# Altium PCB v1.PcbDoc (part 2 of 2)
Units mil, origin at the board's own origin, x right, y up, seen from the top; angles counter-clockwise.
Board outline 4577.38 x 7303.15 mil, 2 copper layers (Top Layer, Bottom Layer); 301 components, 195 nets, 1014 pads, 0 vias.
Unrouted connection lines stored in the file: 517.
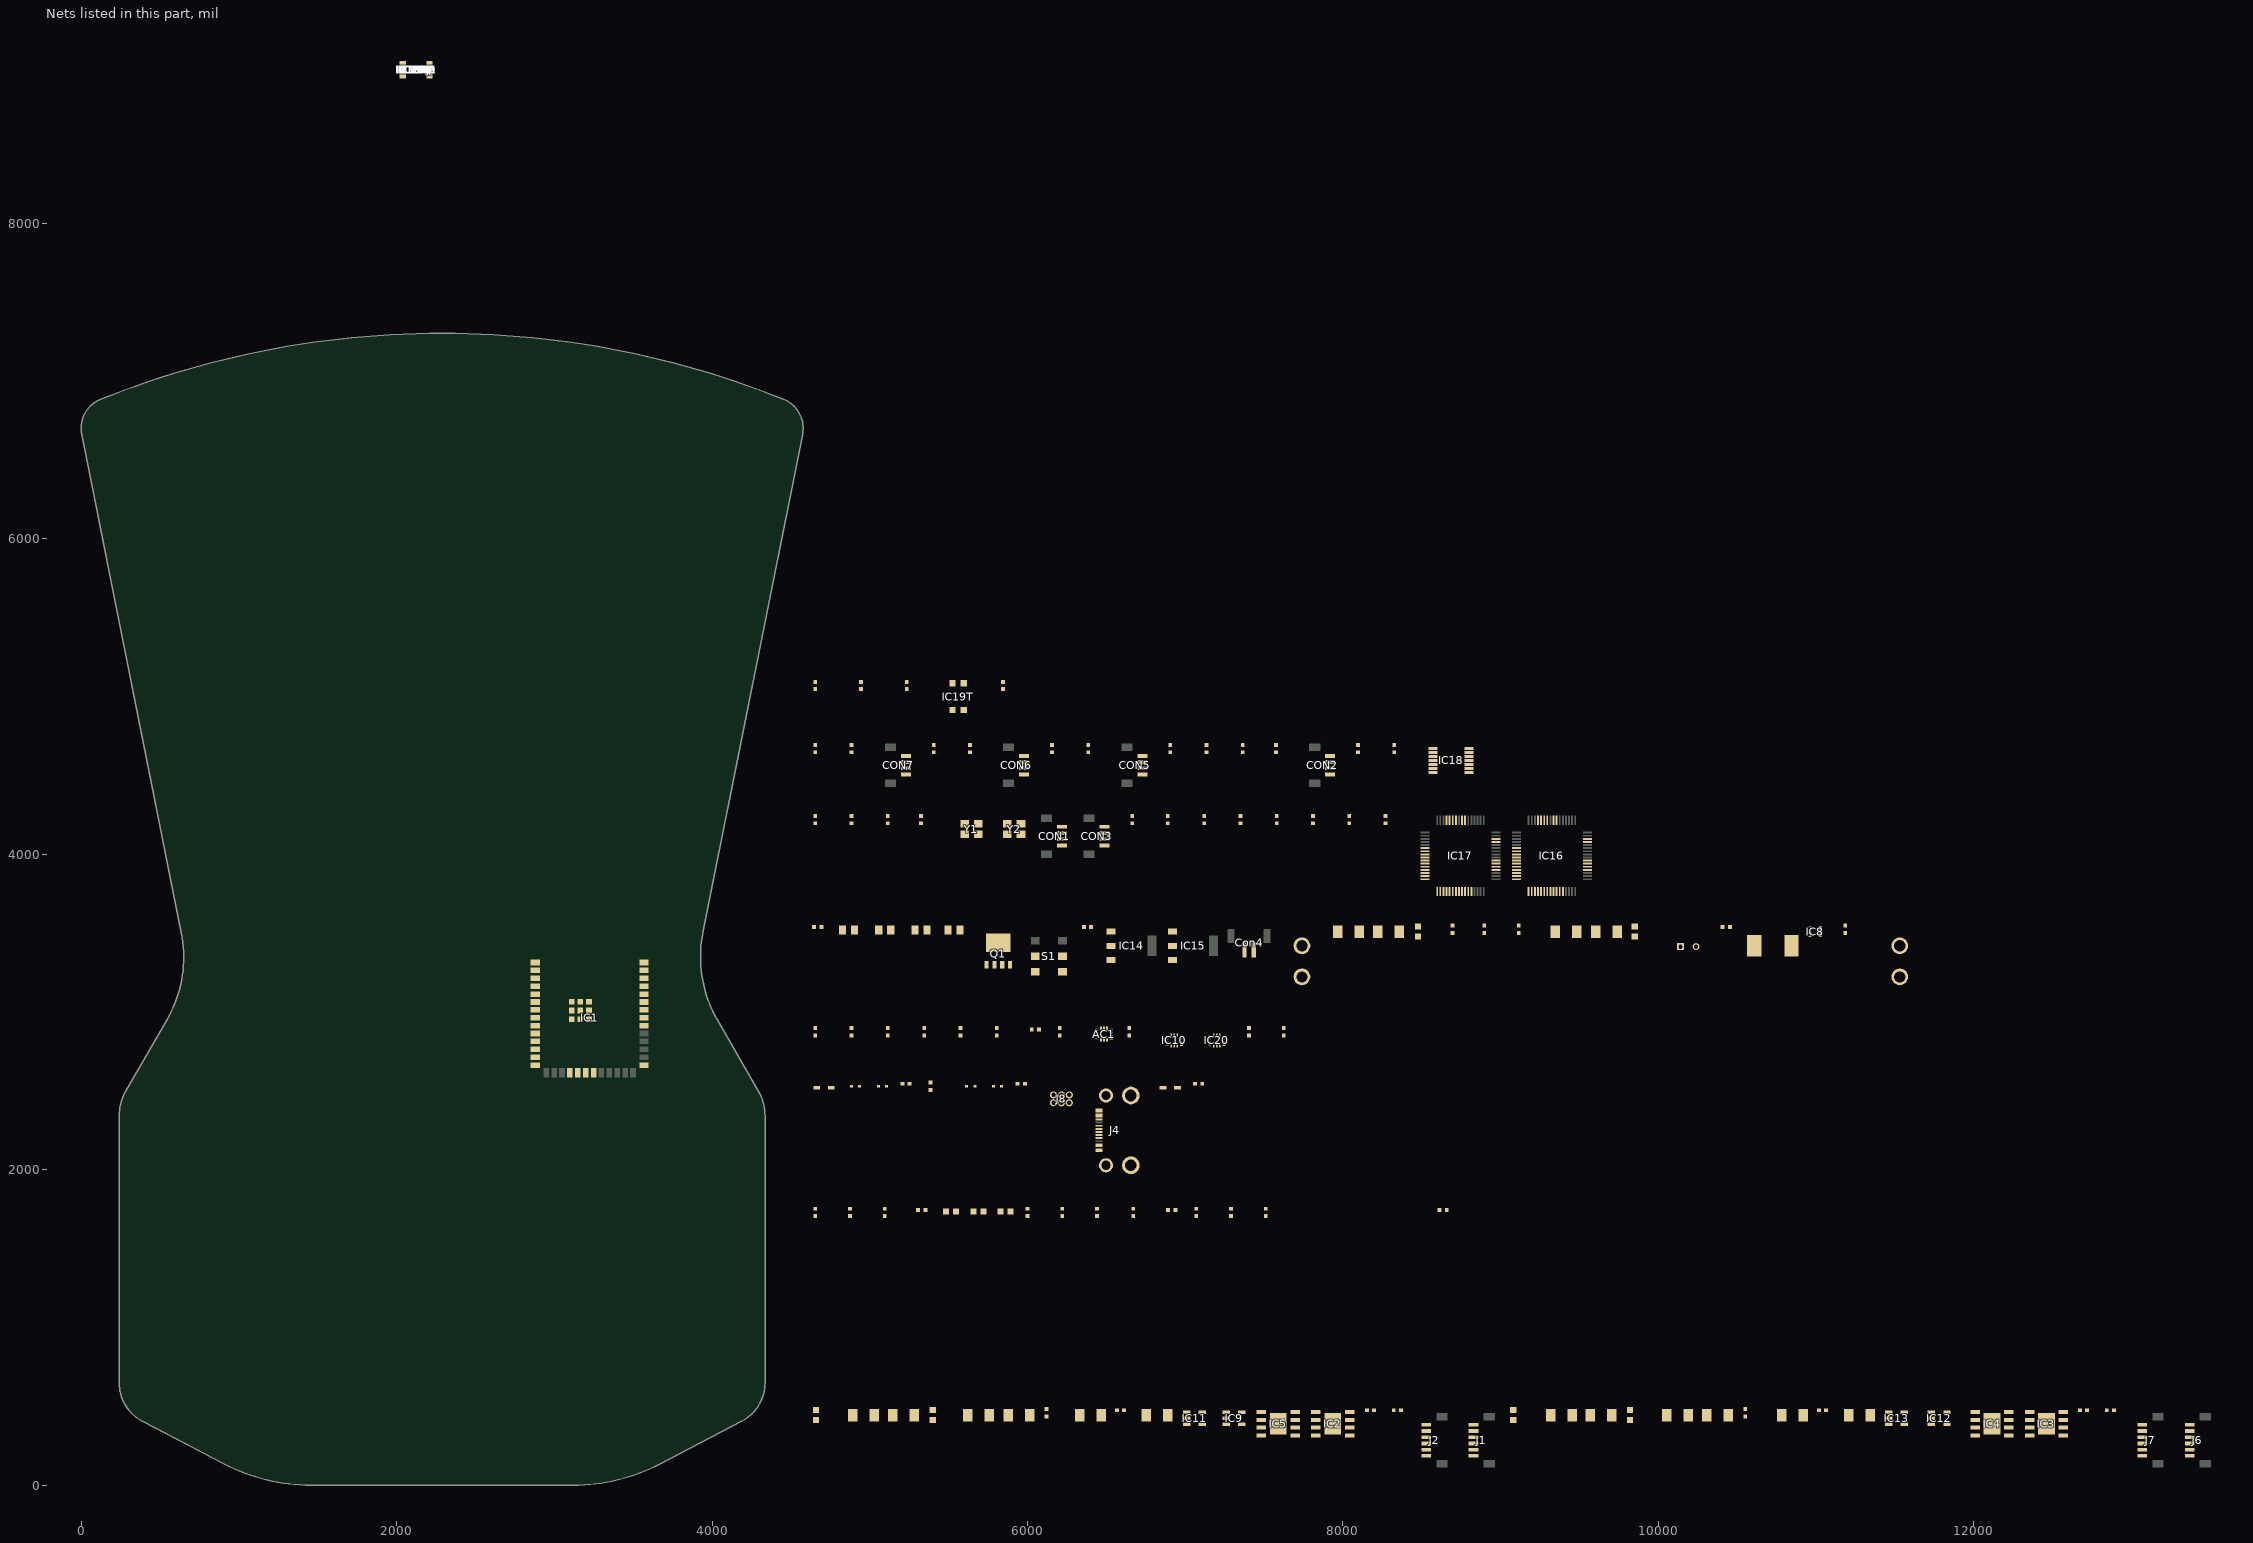
[diagram p2: the nets of this part, all layers, seen from the top]

## Part data
AC1: "Accelerometer", Manufacturer_Name=STMicroelectronics, Mouser Part Number=511-LSM6DSOXTR, Arrow Part Number=LSM6DSOXTR, Arrow Price/Stock=https://www.arrow.com/en/products/lsm6dsoxtr/stmicroelectronics?region=europe, Datasheet Link=https://www.st.com/resource/en/datasheet/lsm6dsox.pdf, Manufacturer_Part_Number=LSM6DSOXTR, Mouser Price/Stock=https://www.mouser.co.uk/ProductDetail/STMicroelectronics/LSM6DSOXTR?qs=l7cgNqFNU1i9dcjzItLpVQ%3D%3D
C1 C2 C3 C4 C5 C6 C7 C8 C9 C10 C11 C12 C13 C14 C15 C16 C17 C18 C19 C20 C21 C22 C23 C24 C26 C27 C28 C29 C30 C31 C32 C33 C34 C35 C36 C37 C38 C39 C40 C41 C42 C43 C44 C45 C46 C47 C48 C49 C50 C51 C52 C53A C53AA C53AB C53AC C53AD C53AE C53AF C53B C53C C53D C53E C53F C53G C53H C53I C53J C53K C53L C53M C53N C53O C53P C53Q C53R C53S C53T C53U C53V C53W C53X C53Y C53Z C54 C55: library part Capacitor, "MLCC Capacitor"
C25: "Capacitor Polarised", Manufacturer_Name=Nichicon, Arrow Part Number=UVY1V101MED1TD, Arrow Price/Stock=https://www.arrow.com/en/products/uvy1v101med1td/nichicon, Datasheet Link=http://nichicon-us.com/english/products/pdfs/e-uvy.pdf, Height=12.5mm, Manufacturer_Part_Number=UVY1V101MED1TD
D3 D4 D5 D6: "TVS Diode (Bi-directional)", Manufacturer_Name=LRC, Height=0.7mm, Manufacturer_Part_Number=LESD5D5.0CT1G
IC1: "Integrated Circuit", Manufacturer_Name="Espressif Systems", Mouser Part Number=356-ESP32S3WRM1N16R8, Datasheet Link=https://www.espressif.com/sites/default/files/documentation/esp32-s3-wroom-1_wroom-1u_datasheet_en.pdf, Height=3.25mm, Manufacturer_Part_Number=ESP32-S3-WROOM-1-N16R8, Mouser Price/Stock=https://www.mouser.co.uk/ProductDetail/Espressif-Systems/ESP32-S3-WROOM-1-N16R8?qs=Li%252BoUPsLEnvQc9gW6AMhZg%3D%3D
IC2 IC3 IC4 IC5: "Integrated Circuit", Manufacturer_Name="Texas Instruments", Mouser Part Number=595-DRV8251DDAR, Arrow Part Number=DRV8251DDAR, Arrow Price/Stock=https://www.arrow.com/en/products/drv8251ddar/texas-instruments?region=nac, Datasheet Link=https://www.arrow.com/en/products/drv8251ddar/texas-instruments?region=nac, Height=1.7mm, Manufacturer_Part_Number=DRV8251DDAR, Mouser Price/Stock=https://www.mouser.co.uk/ProductDetail/Texas-Instruments/DRV8251DDAR?qs=doiCPypUmgHTzZyfapGahQ%3D%3D
IC6 IC7: "Integrated Circuit", Manufacturer_Name="Lattice Semiconductor", Mouser Part Number=N/A, Datasheet Link=https://www.diodes.com/assets/Datasheets/ds30498.pdf, Height=1.2mm, Manufacturer_Part_Number=BAT760-7, Mouser Price/Stock=https://www.mouser.com/Search/Refine.aspx?Keyword=N%2FA
IC8: "Integrated Circuit", Manufacturer_Name="Texas Instruments", Mouser Part Number=595-TPS62933DRLR, Arrow Part Number=TPS62933DRLR, Arrow Price/Stock=https://www.arrow.com/en/products/tps62933drlr/texas-instruments?utm_currency=USD&region=nac, Datasheet Link=https://www.ti.com/lit/ds/symlink/tps62933.pdf?ts=1626073394234, Height=0.6mm, Manufacturer_Part_Number=TPS62933DRLR, Mouser Price/Stock=https://www.mouser.co.uk/ProductDetail/Texas-Instruments/TPS62933DRLR?qs=Rp5uXu7WBW9fv47wfQVntQ%3D%3D
IC9 IC11 IC12 IC13: "Integrated Circuit", Manufacturer_Name="Texas Instruments", Mouser Part Number=595-INA180A2IDBVR, Arrow Part Number=INA180A2IDBVR, Arrow Price/Stock=https://www.arrow.com/en/products/ina180a2idbvr/texas-instruments?utm_currency=USD&region=nac, Datasheet Link=http://www.ti.com/lit/ds/symlink/ina180.pdf, Height=1.45mm, Manufacturer_Part_Number=INA180A2IDBVR, Mouser Price/Stock=https://www.mouser.co.uk/ProductDetail/Texas-Instruments/INA180A2IDBVR?qs=5aG0NVq1C4wYcJfa99BoHg%3D%3D
IC10 IC20: "Integrated Circuit", Manufacturer_Name=BOSCH, Mouser Part Number=262-BMI323, Arrow Part Number=BMI323, Arrow Price/Stock=https://www.arrow.com/en/products/bmi323/bosch?utm_currency=USD&region=nac, Datasheet Link=https://www.bosch-sensortec.com/media/boschsensortec/downloads/datasheets/bst-bmi323-ds000.pdf, Height=0.87mm, Manufacturer_Part_Number=BMI323, Mouser Price/Stock=https://www.mouser.co.uk/ProductDetail/Bosch-Sensortec/BMI323?qs=By6Nw2ByBD3%2FE1v0UqNQPQ%3D%3D
IC14: "Integrated Circuit", Manufacturer_Name=Advanced, Datasheet Link=https://datasheet.datasheetarchive.com/originals/distributors/Datasheets-28/DSA-550594.pdf, Height=1.8mm, Manufacturer_Part_Number=AMS1117-3.3
IC15: library part AMS1117-3.3, "Integrated Circuit", Manufacturer_Name=Advanced, Datasheet Link=https://datasheet.datasheetarchive.com/originals/distributors/Datasheets-28/DSA-550594.pdf, Height=1.8mm, Manufacturer_Part_Number=AMS1117-3.3
IC16 IC17: "Integrated Circuit", Manufacturer_Name=STMicroelectronics, Mouser Part Number=511-STM32G070RBT6, Arrow Part Number=STM32G070RBT6, Arrow Price/Stock=https://www.arrow.com/en/products/stm32g070rbt6/stmicroelectronics?utm_currency=USD&region=nac, Datasheet Link=https://componentsearchengine.com/Datasheets/1/STM32G070RBT6.pdf, Height=1.6mm, Manufacturer_Part_Number=STM32G070RBT6, Mouser Price/Stock=https://www.mouser.co.uk/ProductDetail/STMicroelectronics/STM32G070RBT6?qs=l7cgNqFNU1g2MF3TqxTHUQ%3D%3D
IC18: "Integrated Circuit", Manufacturer_Name=onsemi, Mouser Part Number=863-MC74HCT125ADTR2G, Arrow Part Number=MC74HCT125ADTR2G, Arrow Price/Stock=https://www.arrow.com/en/products/mc74hct125adtr2g/on-semiconductor?utm_currency=USD&region=nac, Datasheet Link=https://www.onsemi.com/pub/Collateral/MC74HC125A-D.PDF, Height=1.2mm, Manufacturer_Part_Number=MC74HCT125ADTR2G, Mouser Price/Stock=https://www.mouser.co.uk/ProductDetail/onsemi/MC74HCT125ADTR2G?qs=mB5q98eOMcZnEC08OY8tTw%3D%3D
IC19A IC19AA IC19AB IC19AC IC19AD IC19AE IC19AF IC19B IC19C IC19D IC19E IC19F IC19G IC19H IC19I IC19J IC19K IC19L IC19M IC19N IC19O IC19P IC19Q IC19R IC19S IC19T IC19U IC19V IC19W IC19X IC19Y IC19Z: "Integrated Circuit", Manufacturer_Name=Kingbright, Mouser Part Number=N/A, Datasheet Link=https://componentsearchengine.com/Datasheets/2/KTIR0711S.pdf, Height=1.75mm, Manufacturer_Part_Number=KTIR0711S, Mouser Price/Stock=https://www.mouser.co.uk/ProductDetail/Kingbright/KTIR0711S?qs=2JU0tDl2GZ3YXiPz2j0FpQ%3D%3D
J1 J2 J6 J7: "Connector", Arrow Part Number=BM06B-SRSS-TB(LF)(SN), Manufacturer_Name="JST (JAPAN SOLDERLESS TERMINALS)", Mouser Part Number=N/A, Arrow Price/Stock=https://www.arrow.com/en/products/bm06b-srss-tb-lf-sn/jst-manufacturing?region=europe, Datasheet Link=http://www.jst-mfg.com/product/pdf/eng/eSR.pdf, Height=4.25mm, Manufacturer_Part_Number=BM06B-SRSS-TB(LF)(SN), Mouser Price/Stock=https://www.mouser.co.uk/ProductDetail/JST-Commercial/BM06B-SRSS-TBLFSN?qs=IKkN%2F947nfAcbKIXx%2F1kIg%3D%3D
J3 J5: "Connector", Manufacturer_Name=Amass, Datasheet Link=https://www.tme.eu/Document/4acc913878197f8c2e30d4b8cdc47230/XT30UPB%20SPEC.pdf, Height=10.7mm, Manufacturer_Part_Number=XT30PB
J4: "Connector", Manufacturer_Name="GCT (GLOBAL CONNECTOR TECHNOLOGY)", Mouser Part Number=640-USB4500030A, Datasheet Link=https://componentsearchengine.com/Datasheets/2/USB4500-03-0-A.pdf, Manufacturer_Part_Number=USB4500-03-0-A, Mouser Price/Stock=https://www.mouser.co.uk/ProductDetail/GCT/USB4500-03-0-A?qs=7D1LtPJG0i2mVyw7UtV%2FkQ%3D%3D
J8: "Connector", Manufacturer_Name=SAMTEC, Mouser Part Number=200-FTSH10301FD, Arrow Part Number=FTSH-103-01-F-D, Arrow Price/Stock=https://www.arrow.com/en/products/ftsh-103-01-f-d/samtec, Datasheet Link=http://suddendocs.samtec.com/prints/ftsh-1xx-xx-xxx-d-xxx-xx-mkt.pdf, Manufacturer_Part_Number=FTSH-103-01-F-D, Mouser Price/Stock=https://www.mouser.co.uk/ProductDetail/Samtec/FTSH-103-01-F-D?qs=0lQeLiL1qyb7OHmlWV4egA%3D%3D
L1: library part Inductor, "General pourpouse inductor"
Q1: "P-Mosfet 30V 67A Rds(on) 3.1mR"
R1 R2 R3 R4 R5 R6 R7 R8 R9 R10 R11 R12 R13 R14 R15 R16 R17 R18 R19 R20 R21 R22 R23 R24 R25 R26 R27 R28 R29 R30 R31 R32 R33 R34 R35 R36 R37 R38 R39 R40A R40AA R40AB R40AC R40AD R40AE R40AF R40B R40C R40D R40E R40F R40G R40H R40I R40J R40K R40L R40M R40N R40O R40P R40Q R40R R40S R40T R40U R40V R40W R40X R40Y R40Z R41A R41AA R41AB R41AC R41AD R41AE R41AF R41B R41C R41D R41E R41F R41G R41H R41I R41J R41K R41L R41M R41N R41O R41P R41Q R41R R41S R41T R41U R41V R41W R41X R41Y R41Z R42A R42AA R42AB R42AC R42AD R42AE R42AF R42B R42C R42D R42E R42F R42G R42H R42I R42J R42K R42L R42M R42N R42O R42P R42Q R42R R42S R42T R42U R42V R42W R42X R42Y R42Z R43: library part Resistor, "General pourpouse resistor"
S1: "Switch", Manufacturer_Name="Nidec Copal", Mouser Part Number=229-CL-SB-22B-01T, Datasheet Link=https://www.nidec-copal-electronics.com/e/catalog/switch/cl-sb.pdf, Height=5.5mm, Manufacturer_Part_Number=CL-SB-22B-01T, Mouser Price/Stock=https://www.mouser.co.uk/ProductDetail/Nidec-Components/CL-SB-22B-01T?qs=XeJtXLiO41T0x7ZRpBUZfA%3D%3D
Y1 Y2: "Crystal or Oscillator", Manufacturer_Name=MULTICOMP, Datasheet Link=https://www.farnell.com/datasheets/2864166.pdf, Height=0.8mm, Manufacturer_Part_Number=MCSJK-7U-16.00-12-30-80-B-30

## Nets (pads, with @x,y where several pads share a name; then routed paths per layer and width w, separated by ;. In a path a pad name is that pad's centre, name@x,y a point inside that pad or via, vN(x,y) a via of type N, cw(c..) or ccw(c..) an arc to the next point about the centre after c; other vN are vias at no path point)
3.3V: AC1.5 AC1.8 C1.1 C2.1 C3.2 C4.1 C5.1 C6.1 C9.1 C10.1 C11.1 C13.1 C14.1 C16.1 C17.1 C18.1 C23.1 C24.1 C27.1 C28.1 C29.1 C33.1 C34.1 C39.1 C43.1 C44.1 C45.1 C46.1 C54.2 C55.1 D1.1 IC1.2 IC2.4 IC3.4 IC4.4 IC5.4 IC9.5 IC10.5 IC10.8 IC11.5 IC12.5 IC13.5 IC14.2 IC16.6 IC16.7 IC16.8 IC17.6 IC17.7 IC17.8 IC20.5 IC20.8 J1.3 J2.3 J6.3 J7.3 J8.2 L1.2 R2.2 R10.1 R14.2 R15.2 R19.2 R21.2 R26.2 R27.2 R40A.2 R40AA.2 R40AB.2 R40AC.2 R40AD.2 R40AE.2 R40AF.2 R40B.2 R40C.2 R40D.2 R40E.2 R40F.2 R40G.2 R40H.2 R40I.2 R40J.2 R40K.2 R40L.2 R40M.2 R40N.2 R40O.2 R40P.2 R40Q.2 R40R.2 R40S.2 R40T.2 R40U.2 R40V.2 R40W.2 R40X.2 R40Y.2 R40Z.2 R41A.1 R41AA.1 R41AB.1 R41AC.1 R41AD.1 R41AE.1 R41AF.1 R41B.1 R41C.1 R41D.1 R41E.1 R41F.1 R41G.1 R41H.1 R41I.1 R41J.1 R41K.1 R41L.1 R41M.1 R41N.1 R41O.1 R41P.1 R41Q.1 R41R.1 R41S.1 R41T.1 R41U.1 R41V.1 R41W.1 R41X.1 R41Y.1 R41Z.1 R43.2
5V: C7.1 C8.1 C40.1 C41.1 D7.1 IC6.1 IC7.1 IC14.3 IC15.2 IC18.14 R28.2 R34.2
5V_PMW_1: IC18.3 R30.2
5V_PMW_2: IC18.6 R32.2
5V_PMW_3: IC18.8 R36.2
5V_PMW_4: IC18.11 R38.2
12V: C12.1 C20.1 C21.1 C22.1 C25.1 C30.1 C31.1 C32.1 C35.1 C36.1 C37.1 C38.1 C42.1 CON5.4 CON7.4 D2.1 IC2.5 IC3.5 IC4.5 IC5.5 IC8.3 IC15.3 J3.1 J5.1 Q1.5_8 R4.2 R29.2 R35.2
ADC1-0: C53AF.1 IC16.17 R42AF.1
ADC1-1: C53AE.1 IC16.18 R42AE.1
ADC1-2: C53AD.1 IC16.19 R42AD.1
ADC1-3: C53AC.1 IC16.20 R42AC.1
ADC1-4: C53AB.1 IC16.21 R42AB.1
ADC1-5: C53AA.1 IC16.22 R42AA.1
ADC1-6: C53Z.1 IC16.23 R42Z.1
ADC1-7: C53Y.1 IC16.24 R42Y.1
ADC1-8: C53W.1 IC16.27 R42W.1
ADC1-9: C53X.1 IC16.28 R42X.1
ADC1-10: C53H.1 IC16.13 R42H.1
ADC1-11: C53G.1 IC16.14 R42G.1
ADC1-12: C53F.1 IC16.15 R42F.1
ADC1-13: C53E.1 IC16.16 R42E.1
ADC1-14: C53U.1 IC16.25 R42U.1
ADC1-15: C53V.1 IC16.26 R42V.1
ADC2-0: C53T.1 IC17.17 R42T.1
ADC2-1: C53S.1 IC17.18 R42S.1
ADC2-2: C53R.1 IC17.19 R42R.1
ADC2-3: C53Q.1 IC17.20 R42Q.1
ADC2-4: C53P.1 IC17.21 R42P.1
ADC2-5: C53O.1 IC17.22 R42O.1
ADC2-6: C53N.1 IC17.23 R42N.1
ADC2-7: C53M.1 IC17.24 R42M.1
ADC2-8: C53K.1 IC17.27 R42K.1
ADC2-9: C53L.1 IC17.28 R42L.1
ADC2-10: C53D.1 IC17.13 R42D.1
ADC2-11: C53C.1 IC17.14 R42C.1
ADC2-12: C53B.1 IC17.15 R42B.1
ADC2-13: C53A.1 IC17.16 R42A.1
ADC2-14: C53I.1 IC17.25 R42I.1
ADC2-15: C53J.1 IC17.26 R42J.1
Battery: IC1.12 R4.1 R5.2
EN: C26.1 IC1.3 J8.1 R2.1
GND: AC1.6 AC1.7 C1.2 C2.2 C3.1 C4.2 C5.2 C6.2 C7.2 C8.2 C9.2 C10.2 C11.2 C12.2 C13.2 C14.2 C16.2 C17.2 C18.2 C19.2 C20.2 C21.2 C22.2 C23.2 C24.2 C25.2 C26.2 C27.2 C28.2 C29.2 C30.2 C31.2 C32.2 C33.2 C34.2 C35.2 C36.2 C37.2 C38.2 C39.2 C40.2 C41.2 C42.2 C43.2 C44.2 C45.2 C46.2 C47.2 C48.2 C49.2 C50.2 C51.2 C52.2 C53A.2 C53AA.2 C53AB.2 C53AC.2 C53AD.2 C53AE.2 C53AF.2 C53B.2 C53C.2 C53D.2 C53E.2 C53F.2 C53G.2 C53H.2 C53I.2 C53J.2 C53K.2 C53L.2 C53M.2 C53N.2 C53O.2 C53P.2 C53Q.2 C53R.2 C53S.2 C53T.2 C53U.2 C53V.2 C53W.2 C53X.2 C53Y.2 C53Z.2 C54.1 C55.2 CON1.3 CON2.3 CON3.3 Con4.2 CON5.3 CON6.3 CON7.3 D3.1 D4.1 D5.1 D6.1 IC1.1 IC1.40 IC1.41 IC1.42 IC1.43 IC1.44 IC1.45 IC1.46 IC1.47 IC1.48 IC1.49 IC2.1 IC2.9 IC3.1 IC3.9 IC4.1 IC4.9 IC5.1 IC5.9 IC8.4 IC9.2 IC9.4 IC10.6 IC10.7 IC11.2 IC11.4 IC12.2 IC12.4 IC13.2 IC13.4 IC14.1 IC15.1 IC16.9 IC17.9 IC18.1 IC18.4 IC18.7 IC18.10 IC18.13 IC19A.2 IC19A.4 IC19AA.2 IC19AA.4 IC19AB.2 IC19AB.4 IC19AC.2 IC19AC.4 IC19AD.2 IC19AD.4 IC19AE.2 IC19AE.4 IC19AF.2 IC19AF.4 IC19B.2 IC19B.4 IC19C.2 IC19C.4 IC19D.2 IC19D.4 IC19E.2 IC19E.4 IC19F.2 IC19F.4 IC19G.2 IC19G.4 IC19H.2 IC19H.4 IC19I.2 IC19I.4 IC19J.2 IC19J.4 IC19K.2 IC19K.4 IC19L.2 IC19L.4 IC19M.2 IC19M.4 IC19N.2 IC19N.4 IC19O.2 IC19O.4 IC19P.2 IC19P.4 IC19Q.2 IC19Q.4 IC19R.2 IC19R.4 IC19S.2 IC19S.4 IC19T.2 IC19T.4 IC19U.2 IC19U.4 IC19V.2 IC19V.4 IC19W.2 IC19W.4 IC19X.2 IC19X.4 IC19Y.2 IC19Y.4 IC19Z.2 IC19Z.4 IC20.6 IC20.7 J1.6 J2.6 J3.2 J4.A1 J4.A12 J4.MH1 J4.MH2 J4.MH3 J4.MH4 J5.2 J6.6 J7.6 J8.4 R3.1 R5.1 R6.1 R11.1 R12.1 R13.1 R17.1 R18.1 R22.2 R23.2 R24.2 R25.2 Y1.2 Y1.4 Y2.2 Y2.4
IO0: IC1.27 J8.6
M1A: IC16.58 J7.5
M1B: IC16.59 J7.4
M2A: IC16.60 J6.5
M2B: IC16.61 J6.4
M3A: IC17.58 J2.5
M3B: IC17.59 J2.4
M4A: IC17.60 J1.5
M4B: IC17.61 J1.4
M_CURR_1: IC1.4 IC13.1
M_CURR_2: IC1.5 IC12.1
M_CURR_3: IC1.6 IC11.1
M_CURR_4: IC1.7 IC9.1
NetAC1_12: AC1.12 R21.1
NetC15_1: C15.1 R9.1
NetC15_2: C15.2 IC8.5 L1.1
NetC19_1: C19.1 IC8.7
NetCON2_1: CON2.1 R32.1 R33.1
NetCON2_2: CON2.2 R30.1 R31.1
NetCON2_4: CON2.4 R28.1 R29.1
NetCon4_1: Con4.1 Q1.1 Q1.2 Q1.3 R1.2 S1.1 S1.4
NetCON6_1: CON6.1 R38.1 R39.1
NetCON6_2: CON6.2 R36.1 R37.1
NetCON6_4: CON6.4 R34.1 R35.1
NetD1_2: D1.2 R12.2
NetD2_2: D2.2 R13.2
NetD3_2: D3.2 IC1.13 J4.A6 J4.B6
NetD4_2: D4.2 IC1.14 J4.A7 J4.B7
NetD5_2: D5.2 IC7.2 J4.A9
NetD6_2: D6.2 IC6.2 J4.A4
NetD7_2: D7.2 R17.2
NetIC1_8: IC1.8 IC17.55
NetIC1_9: IC1.9 IC17.56
NetIC1_10: IC1.10 IC16.55
NetIC1_11: IC1.11 IC16.56
NetIC2_6: IC2.6 J1.1
NetIC2_7: IC2.7 R16.1
NetIC2_8: IC2.8 J1.2
NetIC3_6: IC3.6 J6.1
NetIC3_7: IC3.7 R7.1
NetIC3_8: IC3.8 J6.2
NetIC4_6: IC4.6 J7.1
NetIC4_7: IC4.7 R8.1
NetIC4_8: IC4.8 J7.2
NetIC5_6: IC5.6 J2.1
NetIC5_7: IC5.7 R20.1
NetIC5_8: IC5.8 J2.2
NetIC8_6: IC8.6 R9.2
NetIC8_8: IC8.8 R10.2 R11.2
NetIC9_3: IC9.3 R16.2 R24.1
NetIC10_12: IC10.12 R19.1
NetIC11_3: IC11.3 R20.2 R25.1
NetIC12_3: IC12.3 R7.2 R22.1
NetIC13_3: IC13.3 R8.2 R23.1
NetIC19A_1: IC19A.1 R41A.2
NetIC19A_3: IC19A.3 R40A.1 R42A.2
NetIC19AA_1: IC19AA.1 R41AA.2
NetIC19AA_3: IC19AA.3 R40AA.1 R42AA.2
NetIC19AB_1: IC19AB.1 R41AB.2
NetIC19AB_3: IC19AB.3 R40AB.1 R42AB.2
NetIC19AC_1: IC19AC.1 R41AC.2
NetIC19AC_3: IC19AC.3 R40AC.1 R42AC.2
NetIC19AD_1: IC19AD.1 R41AD.2
NetIC19AD_3: IC19AD.3 R40AD.1 R42AD.2
NetIC19AE_1: IC19AE.1 R41AE.2
NetIC19AE_3: IC19AE.3 R40AE.1 R42AE.2
NetIC19AF_1: IC19AF.1 R41AF.2
NetIC19AF_3: IC19AF.3 R40AF.1 R42AF.2
NetIC19B_1: IC19B.1 R41B.2
NetIC19B_3: IC19B.3 R40B.1 R42B.2
NetIC19C_1: IC19C.1 R41C.2
NetIC19C_3: IC19C.3 R40C.1 R42C.2
NetIC19D_1: IC19D.1 R41D.2
NetIC19D_3: IC19D.3 R40D.1 R42D.2
NetIC19E_1: IC19E.1 R41E.2
NetIC19E_3: IC19E.3 R40E.1 R42E.2
NetIC19F_1: IC19F.1 R41F.2
NetIC19F_3: IC19F.3 R40F.1 R42F.2
NetIC19G_1: IC19G.1 R41G.2
NetIC19G_3: IC19G.3 R40G.1 R42G.2
NetIC19H_1: IC19H.1 R41H.2
NetIC19H_3: IC19H.3 R40H.1 R42H.2
NetIC19I_1: IC19I.1 R41I.2
NetIC19I_3: IC19I.3 R40I.1 R42I.2
NetIC19J_1: IC19J.1 R41J.2
NetIC19J_3: IC19J.3 R40J.1 R42J.2
NetIC19K_1: IC19K.1 R41K.2
NetIC19K_3: IC19K.3 R40K.1 R42K.2
NetIC19L_1: IC19L.1 R41L.2
NetIC19L_3: IC19L.3 R40L.1 R42L.2
NetIC19M_1: IC19M.1 R41M.2
NetIC19M_3: IC19M.3 R40M.1 R42M.2
NetIC19N_1: IC19N.1 R41N.2
NetIC19N_3: IC19N.3 R40N.1 R42N.2
NetIC19O_1: IC19O.1 R41O.2
NetIC19O_3: IC19O.3 R40O.1 R42O.2
NetIC19P_1: IC19P.1 R41P.2
NetIC19P_3: IC19P.3 R40P.1 R42P.2
NetIC19Q_1: IC19Q.1 R41Q.2
NetIC19Q_3: IC19Q.3 R40Q.1 R42Q.2
NetIC19R_1: IC19R.1 R41R.2
NetIC19R_3: IC19R.3 R40R.1 R42R.2
NetIC19S_1: IC19S.1 R41S.2
NetIC19S_3: IC19S.3 R40S.1 R42S.2
NetIC19T_1: IC19T.1 R41T.2
NetIC19T_3: IC19T.3 R40T.1 R42T.2
NetIC19U_1: IC19U.1 R41U.2
NetIC19U_3: IC19U.3 R40U.1 R42U.2
NetIC19V_1: IC19V.1 R41V.2
NetIC19V_3: IC19V.3 R40V.1 R42V.2
NetIC19W_1: IC19W.1 R41W.2
NetIC19W_3: IC19W.3 R40W.1 R42W.2
NetIC19X_1: IC19X.1 R41X.2
NetIC19X_3: IC19X.3 R40X.1 R42X.2
NetIC19Y_1: IC19Y.1 R41Y.2
NetIC19Y_3: IC19Y.3 R40Y.1 R42Y.2
NetIC19Z_1: IC19Z.1 R41Z.2
NetIC19Z_3: IC19Z.3 R40Z.1 R42Z.2
NetIC20_12: IC20.12 R43.1
NetJ4_A5: J4.A5 R6.2
NetJ4_B5: J4.B5 R18.2
NetQ1_4: Q1.4 R1.1
NetR3_2: R3.2 S1.2 S1.5
OSC_IN1: C49.1 IC16.10 Y1.1
OSC_IN2: C51.1 IC17.10 Y2.1
OSC_OUT1: C50.1 IC16.11 Y1.3
OSC_OUT2: C52.1 IC17.11 Y2.3
PWM1: IC1.18 IC4.2
PWM1_STM1: IC16.36 IC18.2 R31.2
PWM1_STM2: IC17.36 IC18.12 R39.2
PWM2: IC1.19 IC4.3
PWM2_STM1: IC16.37 IC18.5 R33.2
PWM2_STM2: IC17.37 IC18.9 R37.2
PWM3: IC1.32 IC5.2
PWM3_STM1: CON5.2 IC16.39
PWM3_STM2: CON7.2 IC17.39
PWM4: IC1.33 IC5.3
PWM4_STM1: CON5.1 IC16.38
PWM4_STM2: CON7.1 IC17.38
PWM5: IC1.34 IC2.2
PWM6: IC1.35 IC2.3
PWM7: IC1.20 IC3.2
PWM8: IC1.21 IC3.3
RESET1: C47.1 CON1.1 IC16.12 R26.1
RESET2: C48.1 CON3.1 IC17.12 R27.1
RXD0: IC1.37 J8.5
SCL: AC1.13 IC1.39 IC10.13 IC20.13 R15.1
SCLK1: CON1.4 IC16.45
SCLK2: CON3.4 IC17.45
SDA: AC1.14 IC1.38 IC10.14 IC20.14 R14.1
SWDIO1: CON1.2 IC16.46
SWDIO2: CON3.2 IC17.46
TXD0: IC1.36 J8.3
pads on no net: AC1.1 AC1.2 AC1.3 AC1.4 AC1.9 AC1.10 AC1.11 CON1.A CON1.B CON2.A CON2.B CON3.A CON3.B Con4.0 CON5.A CON5.B CON6.A CON6.B CON7.A CON7.B IC1.15 IC1.16 IC1.17 IC1.22 IC1.23 IC1.24 IC1.25 IC1.26 IC1.28 IC1.29 IC1.30 IC1.31 IC8.1 IC8.2 IC10.1 IC10.2 IC10.3 IC10.4 IC10.9 IC10.10 IC10.11 IC14.4 IC15.4 IC16.1 IC16.2 IC16.3 IC16.4 IC16.5 IC16.29 IC16.30 IC16.31 IC16.32 IC16.33 IC16.34 IC16.35 IC16.40 IC16.41 IC16.42 IC16.43 IC16.44 IC16.47 IC16.48 IC16.49 IC16.50 IC16.51 IC16.52 IC16.53 IC16.54 IC16.57 IC16.62 IC16.63 IC16.64 IC17.1 IC17.2 IC17.3 IC17.4 IC17.5 IC17.29 IC17.30 IC17.31 IC17.32 IC17.33 IC17.34 IC17.35 IC17.40 IC17.41 IC17.42 IC17.43 IC17.44 IC17.47 IC17.48 IC17.49 IC17.50 IC17.51 IC17.52 IC17.53 IC17.54 IC17.57 IC17.62 IC17.63 IC17.64 IC20.1 IC20.2 IC20.3 IC20.4 IC20.9 IC20.10 IC20.11 J1.7 J1.8 J2.7 J2.8 J4.A8 J4.B8 J6.7 J6.8 J7.7 J7.8 S1.3 S1.6

## Silkscreen, mask and mechanical layers (free items; w line width, h text height)
Mechanical 1:
  drawing of 348 lines, arcs and shapes, not listed